# Altium PCB pcb-gazlowe.pcbdoc (part 2 of 2)
Units mil, origin at the board's own origin, x right, y up, seen from the top; angles counter-clockwise.
Board outline 13525.17 x 6011.41 mil, 2 copper layers (Top Layer, Bottom Layer); 275 components, 170 nets, 950 pads, 596 vias.
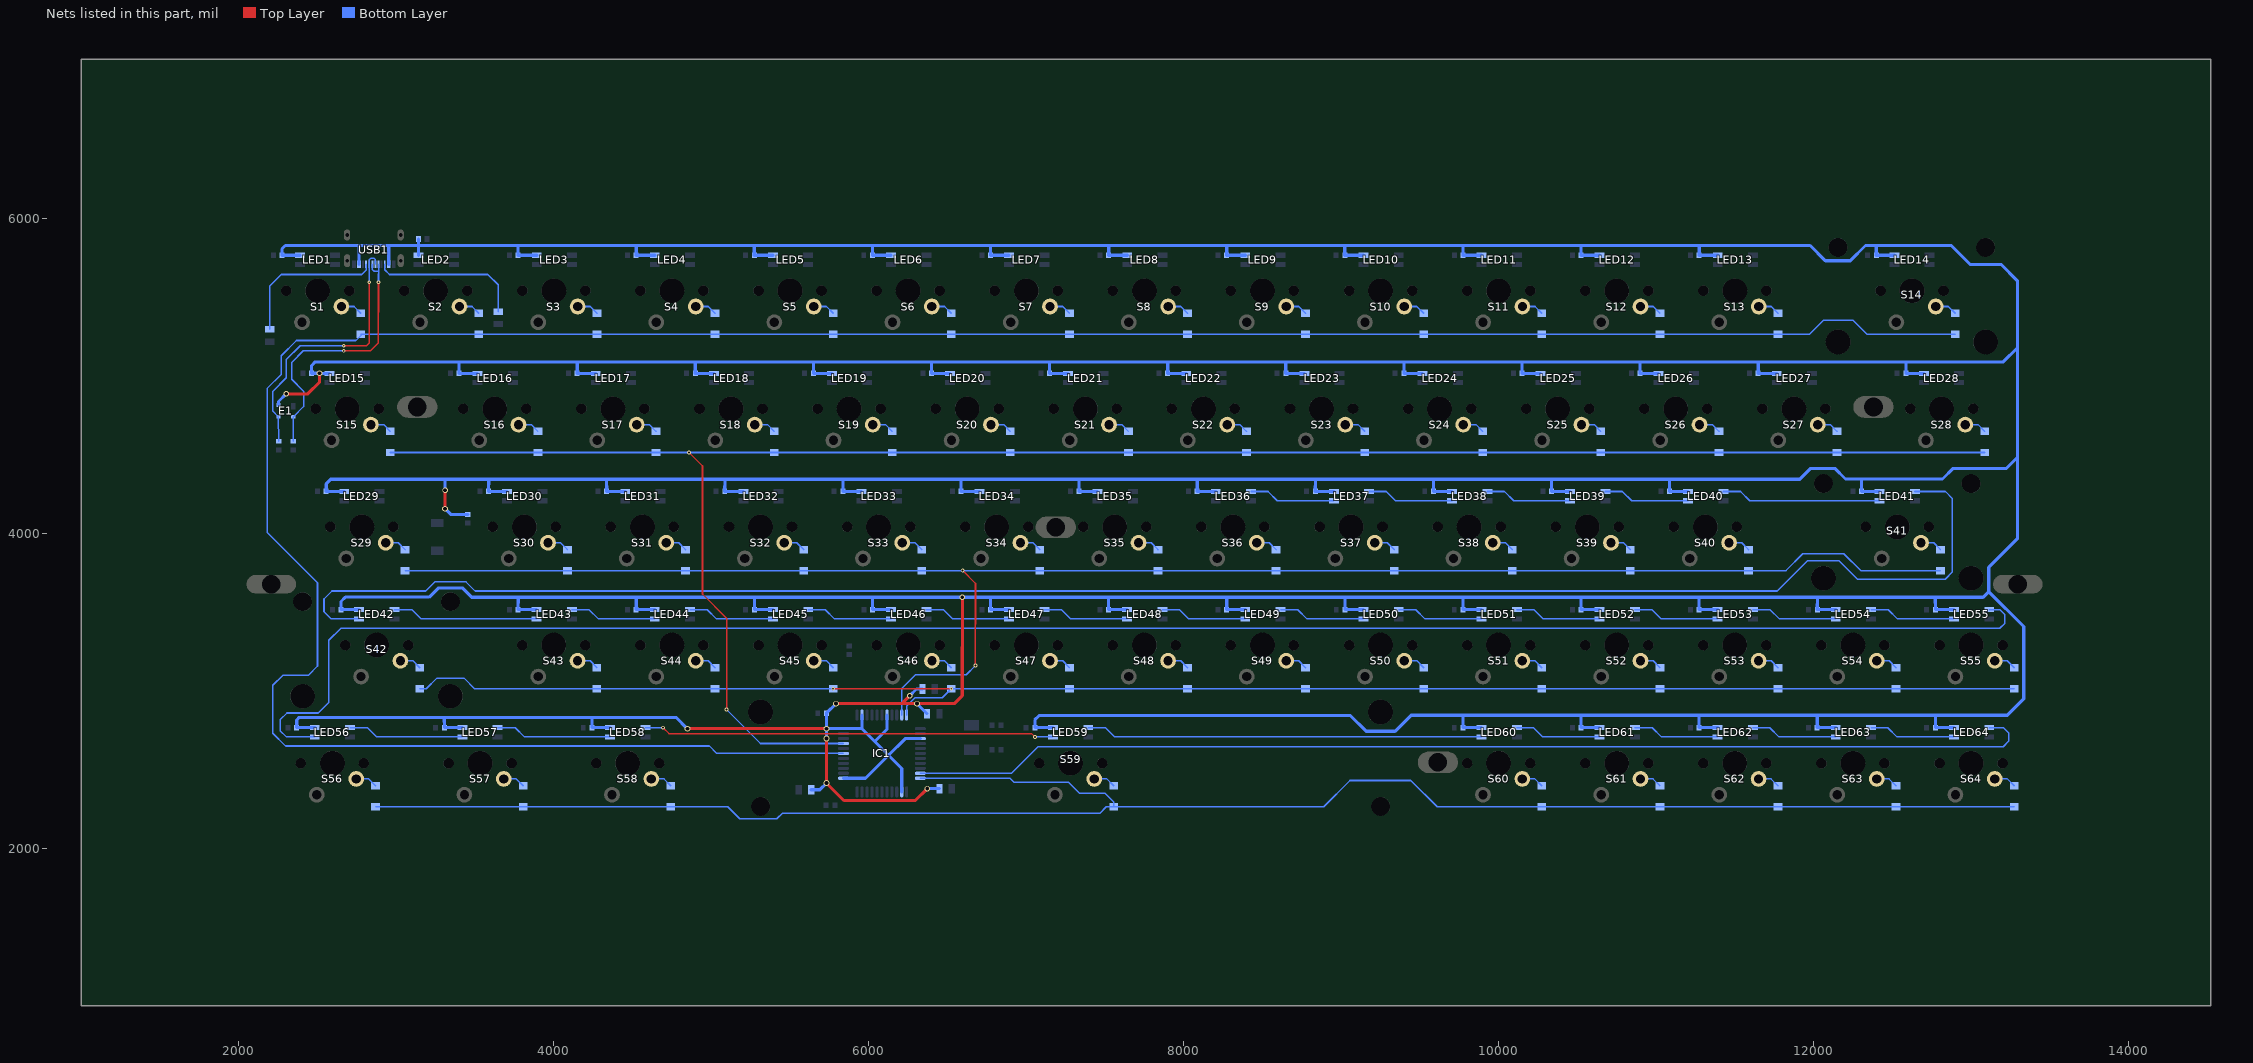
[diagram p2: the nets of this part, all layers, seen from the top]

## Via types
v1: diameter 24.02, hole 12.01, Top Layer to Bottom Layer, tented both sides, 583 vias
v2: diameter 35.98, hole 24.02, Top Layer to Bottom Layer, tented both sides, 13 vias

## Nets (pads, with @x,y where several pads share a name; then routed paths per layer and width w, separated by ;. In a path a pad name is that pad's centre, name@x,y a point inside that pad or via, vN(x,y) a via of type N, cw(c..) or ccw(c..) an arc to the next point about the centre after c; other vN are vias at no path point) (continued)
LED36_4: LED36.4 LED37.2 | length 550.1
  Bottom Layer w10: LED36.4@8430.04,4265.62 8537.4,4265.62 8596.4,4206.52 LED37.2@8955.6,4206.52
LED37_4: LED37.4 LED38.2 | length 550.1
  Bottom Layer w10: LED37.4@9180.04,4265.62 9288.6,4265.62 9347.6,4206.52 LED38.2@9705.6,4206.52
LED38_4: LED38.4 LED39.2 | length 550.1
  Bottom Layer w10: LED38.4@9930.03,4265.62 10038.6,4265.62 10097.6,4206.52 LED39.2@10455.6,4206.52
LED39_4: LED39.4 LED40.2 | length 550.1
  Bottom Layer w10: LED39.4@10680.03,4265.62 10787.8,4265.62 10846.8,4206.52 LED40.2@11205.6,4206.52
LED40_4: LED40.4 LED41.2 | length 1015.7
  Bottom Layer w10: LED40.4@11430.03,4265.62 11537.8,4265.62 11596.8,4206.52 LED41.2@12421.2,4206.52
LED41_4: LED41.4 LED42.2 | length 11601.3
  Bottom Layer w10: LED42.2@2764.96,3456.3 2588.6,3456.32 2542.5,3502.32 2542.5,3582.62 2593.3,3633.42 3188.6,3633.42 3246.5,3691.32 3444.1,3691.32 3502,3633.42 11770.8,3633.42 11961.8,3824.42 12165.3,3824.42 12281.1,3708.62 12838.1,3708.62 12883.4,3753.92 12883.4,4221.72 12839.5,4265.62 LED41.4@12645.7,4265.62
LED42_4: LED42.4 LED43.2 | length 928
  Bottom Layer w10: LED42.4@2989.36,3515.35 3101.2,3515.32 3160.2,3456.32 LED43.2@3893.05,3456.3
LED43_4: LED43.4 LED44.2 | length 549.9
  Bottom Layer w10: LED43.4@4117.5,3515.32 4226,3515.32 4285,3456.32 LED44.2@4643.04,3456.3
LED44_4: LED44.4 LED45.2 | length 550.3
  Bottom Layer w10: LED44.4@4867.5,3515.32 4976,3515.32 5035,3456.32 LED45.2@5393.44,3456.3
LED45_4: LED45.4 LED46.2 | length 550
  Bottom Layer w10: LED45.4@5617.84,3515.35 5726,3515.32 5785,3456.32 LED46.2@6143.43,3456.3
LED46_4: LED46.4 LED47.2 | length 550
  Bottom Layer w10: LED46.4@6367.83,3515.35 6476,3515.32 6535,3456.32 LED47.2@6893.43,3456.3
LED47_4: LED47.4 LED48.2 | length 549.6
  Bottom Layer w10: LED47.4@7117.83,3515.35 7226,3515.32 7285,3456.32 LED48.2@7643.04,3456.3
LED48_4: LED48.4 LED49.2 | length 550
  Bottom Layer w10: LED48.4@7867.44,3515.35 7974.8,3515.32 8033.8,3456.32 LED49.2@8393.03,3456.3
LED49_4: LED49.4 LED50.2 | length 550.4
  Bottom Layer w10: LED49.4@8617.44,3515.35 8726,3515.32 8785,3456.32 LED50.2@9143.42,3456.3
LED50_4: LED50.4 LED51.2 | length 549.6
  Bottom Layer w10: LED50.4@9367.83,3515.35 9476,3515.32 9535,3456.32 LED51.2@9893.03,3456.3
LED51_4: LED51.4 LED52.2 | length 550.4
  Bottom Layer w10: LED51.4@10117.4,3515.32 10226,3515.32 10285,3456.32 LED52.2@10643.42,3456.3
LED52_4: LED52.4 LED53.2 | length 549.6
  Bottom Layer w10: LED52.4@10867.8,3515.32 10976,3515.32 11035,3456.32 LED53.2@11393.02,3456.3
LED53_4: LED53.4 LED54.2 | length 550
  Bottom Layer w10: LED53.4@11617.4,3515.32 11726,3515.32 11785,3456.32 LED54.2@12143.03,3456.3
LED54_4: LED54.4 LED55.2 | length 550
  Bottom Layer w10: LED54.4@12367.4,3515.32 12476,3515.32 12535,3456.32 LED55.2@12893.02,3456.3
LED55_4: LED55.4 LED56.2 | length 11909.8
  Bottom Layer w10: LED56.2@2483.81,2706.69 2303.9,2706.72 2263.8,2746.82 2263.8,2815.32 2307.4,2859.02 2506.3,2859.02 2572.8,2925.62 2572.8,3320.02 2650,3397.22 13185,3397.22 13215.7,3427.92 13215.7,3485.02 13185.4,3515.32 LED55.4@13117.43,3515.35
LED56_4: LED56.4 LED57.2 | length 737.4
  Bottom Layer w10: LED56.4@2708.22,2765.74 2818.5,2765.72 2877.6,2706.72 LED57.2@3421.21,2706.69
LED57_4: LED57.4 LED58.2 | length 737.4
  Bottom Layer w10: LED57.4@3645.61,2765.74 3756.7,2765.72 3815.7,2706.72 LED58.2@4358.61,2706.69
LED58_4: LED58.4 LED59.2 | length 2612.7
  Top Layer w10: v1(4695.66,2765.74) 4733.1,2728.32 7035.45,2728.32 v1(7057.08,2706.69)
  Bottom Layer w10: LED58.4@4583.02,2765.74 v1(4695.66,2765.74) ; v1(7057.08,2706.69) LED59.2@7171.25,2706.69
LED59_4: LED59.4 LED60.2 | length 2521.7
  Bottom Layer w10: LED59.4@7395.66,2765.74 7505.1,2765.72 7564.2,2706.72 LED60.2@9893.03,2706.69
LED60_4: LED60.4 LED61.2 | length 550.4
  Bottom Layer w10: LED60.4@10117.43,2765.74 10223.2,2765.72 10282.3,2706.72 LED61.2@10643.42,2706.69
LED61_4: LED61.4 LED62.2 | length 549.6
  Bottom Layer w10: LED61.4@10867.83,2765.74 10976.8,2765.72 11035.8,2706.72 LED62.2@11393.02,2706.69
LED62_4: LED62.4 LED63.2 | length 550
  Bottom Layer w10: LED62.4@11617.43,2765.74 11723.2,2765.72 11782.3,2706.72 LED63.2@12143.02,2706.69
LED63_4: LED63.4 LED64.2 | length 550
  Bottom Layer w10: LED63.4@12367.43,2765.74 12473.2,2765.72 12532.3,2706.72 LED64.2@12893.03,2706.69
RGB: IC1.21 LED64.4 | length 7185.5
  Bottom Layer w10: IC1.21@6329.52,2475.99 6908.3,2476.02 7077.2,2644.92 13206.3,2644.92 13240.5,2679.12 13240.5,2732.62 13207.5,2765.72 LED64.4@13117.43,2765.74
ROW-0: D1.1 D2.1 D3.1 D4.1 D5.1 D6.1 D7.1 D8.1 D9.1 D10.1 D11.1 D12.1 D13.1 D14.1 IC1.39 | length 17224.7
  Bottom Layer w10: D1.1@2776.38,5262.98 D2.1@3525.98,5262.98 D3.1@4276.37,5262.98 D4.1@5025.98,5262.98 D5.1@5775.98,5262.98 D6.1@6525.97,5262.98 D7.1@7276.37,5262.98 D8.1@8026.36,5262.98 D9.1@8775.97,5262.98 D10.1@9525.97,5262.98 D11.1@10276.36,5262.98 D12.1@11026.36,5262.98 D13.1@11776.36,5262.98 11974.8,5263.02 12064.9,5353.12 12252.3,5353.12 12342.5,5263.02 D14.1@12901.16,5262.98 ; D1.1@2783.6,5263.02 2745,5224.42 2368.1,5224.42 2270.5,5126.72 2270.5,5009.02 2181.1,4919.32 2181.1,4006.72 2501.2,3686.62 2501.2,3156.72 2443.7,3099.22 2281.5,3099.22 2217.3,3035.02 2217.3,2730.32 2298.4,2649.22 4990.1,2649.22 5037.4,2601.92 IC1.39@5841.3,2601.92
ROW-1: D15.1 D16.1 D17.1 D18.1 D19.1 D20.1 D21.1 D22.1 D23.1 D24.1 D25.1 D26.1 D27.1 D28.1 IC1.41 | length 12687.2
  Top Layer w10: v1(4860.74,4512.98) 4946.06,4427.67 4946.06,4277.18 4946.06,4252.61 4946.06,3614.17 5099.2,3461.02 v1(5099.2,2880.7)
  Bottom Layer w10: D15.1@2963.78,4512.99 D16.1@3901.18,4512.99 D17.1@4651.18,4512.99 v1(4860.74,4512.98) D18.1@5401.17,4512.99 D19.1@6151.17,4512.99 D20.1@6901.17,4512.99 D21.1@7651.17,4512.99 D22.1@8401.17,4512.99 D23.1@9151.17,4512.99 D24.1@9901.16,4512.99 D25.1@10651.16,4512.99 D26.1@11401.16,4512.99 D27.1@12151.16,4512.99 D28.1@13088.56,4512.99 ; v1(5099.2,2880.7) 5314.6,2665.32 IC1.41@5841.3,2665.32
ROW-2: D29.1 D30.1 D31.1 D32.1 D33.1 D34.1 D35.1 D36.1 D37.1 D38.1 D39.1 D40.1 D41.1 IC1.10 | length 11171.5
  Top Layer w10: v1(6598.43,3762.98) 6679.9,3681.52 v1(6679.12,3159.84)
  Bottom Layer w10: D29.1@3057.48,3762.99 D30.1@4088.58,3762.99 D31.1@4838.18,3762.99 D32.1@5588.57,3762.99 D33.1@6338.57,3762.99 v1(6598.43,3762.98) D34.1@7088.57,3762.99 D35.1@7838.57,3762.99 D36.1@8588.57,3762.99 D37.1@9338.57,3762.99 D38.1@10088.57,3762.99 D39.1@10838.56,3762.99 D40.1@11588.56,3762.99 11826.7,3763.02 11933.4,3869.72 12194.1,3869.72 12300.8,3763.02 D41.1@12807.46,3762.99 ; IC1.10@6211.4,2846.02 6211.4,3014.12 6299.2,3101.92 6621.3,3101.92 v1(6679.12,3159.84)
ROW-3: D42.1 D43.1 D44.1 D45.1 D46.1 D47.1 D48.1 D49.1 D50.1 D51.1 D52.1 D53.1 D54.1 D55.1 IC1.11 | length 10571.9
  Top Layer w10: v1(5775.97,3012.98) v1(6525.97,3012.98)
  Bottom Layer w10: D42.1@3150.78,3012.99 3191.8,3013.02 3259.5,3080.72 3431.1,3080.72 3498.8,3013.02 D43.1@4275.59,3012.99 D44.1@5025.58,3012.99 v1(5775.97,3012.98) ; IC1.11@6242.9,2846.02 6242.9,2902.72 6296.1,2955.92 6468.9,2955.92 v1(6525.97,3012.98) D47.1@7276.37,3012.99 D48.1@8025.97,3012.99 D49.1@8775.97,3012.99 D50.1@9526.36,3012.99 D51.1@10275.97,3012.99 D52.1@11026.36,3012.99 D53.1@11781.1,3013.02 ; D53.1@11775.96,3012.99 D54.1@12525.96,3012.99 D55.1@13275.96,3012.99
ROW-4: D56.1 D57.1 D58.1 D59.1 D60.1 D61.1 D62.1 D63.1 D64.1 IC1.22 | length 11928.5
  Bottom Layer w10: D56.1@2870.08,2262.99 D57.1@3807.08,2262.99 D58.1@4744.88,2262.99 5105.9,2263.02 5182.3,2186.62 5417.7,2186.62 5453.9,2222.82 7470.1,2222.82 7510.2,2263.02 D59.1@7557.47,2262.99 ; IC1.22@6329.52,2444.49 6898.4,2444.12 6924,2418.52 7270.9,2418.52 7340.9,2348.42 7502.3,2348.42 7557.5,2293.22 D59.1@7557.47,2262.99 ; D64.1@13275.96,2262.99 D63.1@12525.96,2262.99 D62.1@11775.96,2262.99 D61.1@11026.36,2262.99 D60.1@10275.97,2262.99 9611.8,2263.02 9444.5,2430.32 9058.3,2430.32 8890.9,2263.02 D59.1@7557.47,2262.99
S1_COL: D1.2 S1.COL | length 141.3
  Bottom Layer w10: S1.COL@2653.11,5440.19 2733.1,5440.22 D1.2@2776.38,5396.84
S2_COL: D2.2 S2.COL | length 141.4
  Bottom Layer w10: S2.COL@3402.71,5440.19 3483.1,5440.22 D2.2@3525.98,5396.84
S3_COL: D3.2 S3.COL | length 141.3
  Bottom Layer w10: S3.COL@4153.1,5440.19 4233,5440.22 D3.2@4276.37,5396.84
S4_COL: D4.2 S4.COL | length 141.3
  Bottom Layer w10: S4.COL@4902.71,5440.19 4982.6,5440.22 D4.2@5025.98,5396.84
S5_COL: D5.2 S5.COL | length 141.4
  Bottom Layer w10: S5.COL@5652.71,5440.19 5733.1,5440.22 D5.2@5775.98,5396.84
S6_COL: D6.2 S6.COL | length 141.4
  Bottom Layer w10: S6.COL@6402.7,5440.19 6483.1,5440.22 D6.2@6525.97,5396.84
S7_COL: D7.2 S7.COL | length 141.5
  Bottom Layer w10: S7.COL@7153.1,5440.19 7233.8,5440.22 D7.2@7276.37,5396.84
S8_COL: D8.2 S8.COL | length 141.3
  Bottom Layer w10: S8.COL@7903.1,5440.19 7983.1,5440.22 D8.2@8026.36,5396.84
S9_COL: D9.2 S9.COL | length 141.4
  Bottom Layer w10: S9.COL@8652.7,5440.19 8733.1,5440.22 D9.2@8775.97,5396.84
S10_COL: D10.2 S10.COL | length 141.3
  Bottom Layer w10: S10.COL@9402.7,5440.19 9482.7,5440.22 D10.2@9525.97,5396.84
S11_COL: D11.2 S11.COL | length 141.3
  Bottom Layer w10: S11.COL@10153.09,5440.19 10233.1,5440.22 D11.2@10276.36,5396.84
S12_COL: D12.2 S12.COL | length 141.3
  Bottom Layer w10: S12.COL@10903.09,5440.19 10983.1,5440.22 D12.2@11026.36,5396.84
S13_COL: D13.2 S13.COL | length 141.2
  Bottom Layer w10: S13.COL@11653.09,5440.19 11732.7,5440.22 D13.2@11776.36,5396.84
S14_COL: D14.2 S14.COL | length 141.3
  Bottom Layer w10: S14.COL@12777.89,5440.19 12857.8,5440.22 D14.2@12901.16,5396.84
S15_COL: D15.2 S15.COL | length 141.5
  Bottom Layer w10: S15.COL@2840.51,4690.19 2921.3,4690.22 D15.2@2963.78,4646.84
S16_COL: D16.2 S16.COL | length 141.3
  Bottom Layer w10: S16.COL@3777.91,4690.19 3857.9,4690.22 D16.2@3901.18,4646.84
S17_COL: D17.2 S17.COL | length 141.5
  Bottom Layer w10: S17.COL@4527.91,4690.19 4608.7,4690.22 D17.2@4651.18,4646.84
S18_COL: D18.2 S18.COL | length 141.5
  Bottom Layer w10: S18.COL@5277.9,4690.19 5358.7,4690.22 D18.2@5401.17,4646.84
S19_COL: D19.2 S19.COL | length 141.5
  Bottom Layer w10: S19.COL@6027.9,4690.19 6108.6,4690.22 D19.2@6151.17,4646.84
S20_COL: D20.2 S20.COL | length 141.5
  Bottom Layer w10: S20.COL@6777.9,4690.19 6858.6,4690.22 D20.2@6901.17,4646.84
S21_COL: D21.2 S21.COL | length 141.3
  Bottom Layer w10: S21.COL@7527.9,4690.19 7607.9,4690.22 D21.2@7651.17,4646.84
S22_COL: D22.2 S22.COL | length 141.5
  Bottom Layer w10: S22.COL@8277.9,4690.19 8358.6,4690.22 D22.2@8401.17,4646.84
S23_COL: D23.2 S23.COL | length 142
  Bottom Layer w10: S23.COL@9027.9,4690.19 9109,4690.22 9151.2,4648.02 D23.2@9151.17,4646.84
S24_COL: D24.2 S24.COL | length 141.3
  Bottom Layer w10: S24.COL@9777.9,4690.19 9857.9,4690.22 D24.2@9901.16,4646.84
S25_COL: D25.2 S25.COL | length 141.5
  Bottom Layer w10: S25.COL@10527.89,4690.19 10608.6,4690.22 D25.2@10651.16,4646.84
S26_COL: D26.2 S26.COL | length 141.3
  Bottom Layer w10: S26.COL@11277.89,4690.19 11357.8,4690.22 D26.2@11401.16,4646.84
S27_COL: D27.2 S27.COL | length 141.3
  Bottom Layer w10: S27.COL@12027.89,4690.19 12107.9,4690.22 D27.2@12151.16,4646.84
S28_COL: D28.2 S28.COL | length 141.4
  Bottom Layer w10: S28.COL@12965.29,4690.19 13045.6,4690.22 D28.2@13088.56,4646.84
S29_COL: D29.2 S29.COL | length 141.2
  Bottom Layer w10: S29.COL@2934.21,3940.19 3013.8,3940.22 D29.2@3057.48,3896.84
S30_COL: D30.2 S30.COL | length 141.2
  Bottom Layer w10: S30.COL@3965.31,3940.2 4044.9,3940.22 D30.2@4088.58,3896.84
S31_COL: D31.2 S31.COL | length 140.9
  Bottom Layer w10: S31.COL@4715.31,3940.2 4794.9,3940.22 D31.2@4838.18,3896.84
S32_COL: D32.2 S32.COL | length 141.3
  Bottom Layer w10: S32.COL@5465.31,3940.19 5545.3,3940.22 D32.2@5588.57,3896.84
S33_COL: D33.2 S33.COL | length 141.2
  Bottom Layer w10: S33.COL@6215.3,3940.19 6294.9,3940.22 D33.2@6338.57,3896.84
S34_COL: D34.2 S34.COL | length 141.2
  Bottom Layer w10: S34.COL@6965.3,3940.19 7044.9,3940.22 D34.2@7088.57,3896.84
S35_COL: D35.2 S35.COL | length 141.3
  Bottom Layer w10: S35.COL@7715.3,3940.19 7795.3,3940.22 D35.2@7838.57,3896.84
S36_COL: D36.2 S36.COL | length 141.3
  Bottom Layer w10: S36.COL@8465.3,3940.19 8545.2,3940.22 D36.2@8588.57,3896.84
S37_COL: D37.2 S37.COL | length 141.3
  Bottom Layer w10: S37.COL@9215.3,3940.19 9295.3,3940.22 D37.2@9338.57,3896.84
S38_COL: D38.2 S38.COL | length 141.3
  Bottom Layer w10: S38.COL@9965.3,3940.19 10045.3,3940.22 D38.2@10088.57,3896.84
S39_COL: D39.2 S39.COL | length 141.3
  Bottom Layer w10: S39.COL@10715.3,3940.19 10795.3,3940.22 D39.2@10838.56,3896.84
S40_COL: D40.2 S40.COL | length 141.4
  Bottom Layer w10: S40.COL@11465.29,3940.19 11545.6,3940.22 D40.2@11588.56,3896.84
S41_COL: D41.2 S41.COL | length 141.4
  Bottom Layer w10: S41.COL@12684.19,3940.19 12764.5,3940.22 D41.2@12807.46,3896.84
S42_COL: D42.2 S42.COL | length 140.8
  Bottom Layer w10: S42.COL@3027.91,3190.19 3107.1,3190.22 D42.2@3150.78,3146.85
S43_COL: D43.2 S43.COL | length 141
  Bottom Layer w10: S43.COL@4152.71,3190.19 4232.7,3190.22 D43.2@4275.59,3146.85
S44_COL: D44.2 S44.COL | length 141
  Bottom Layer w10: S44.COL@4902.71,3190.19 4982.7,3190.22 D44.2@5025.58,3146.85
S45_COL: D45.2 S45.COL | length 141.1
  Bottom Layer w10: S45.COL@5653.1,3190.19 5733.5,3190.22 D45.2@5775.98,3146.85
S46_COL: D46.2 S46.COL | length 140.9
  Bottom Layer w10: S46.COL@6403.1,3190.19 6482.7,3190.22 D46.2@6525.98,3146.85
S47_COL: D47.2 S47.COL | length 141.4
  Bottom Layer w10: S47.COL@7153.1,3190.19 7233.5,3190.22 D47.2@7276.37,3146.85
S48_COL: D48.2 S48.COL | length 141.3
  Bottom Layer w10: S48.COL@7902.7,3190.19 7982.6,3190.22 D48.2@8025.97,3146.85
S49_COL: D49.2 S49.COL | length 141.3
  Bottom Layer w10: S49.COL@8652.7,3190.19 8732.6,3190.22 D49.2@8775.97,3146.85
S50_COL: D50.2 S50.COL | length 141.3
  Bottom Layer w10: S50.COL@9403.09,3190.19 9483.1,3190.22 D50.2@9526.36,3146.85
S51_COL: D51.2 S51.COL | length 141.3
  Bottom Layer w10: S51.COL@10152.7,3190.19 10232.6,3190.22 D51.2@10275.97,3146.85
S52_COL: D52.2 S52.COL | length 141.3
  Bottom Layer w10: S52.COL@10903.09,3190.19 10983.1,3190.22 D52.2@11026.36,3146.85
S53_COL: D53.2 S53.COL | length 141.3
  Bottom Layer w10: S53.COL@11652.69,3190.19 11732.7,3190.22 D53.2@11775.96,3146.85
S54_COL: D54.2 S54.COL | length 141.1
  Bottom Layer w10: S54.COL@12402.69,3190.19 12481.9,3190.22 D54.2@12525.96,3146.85
S55_COL: D55.2 S55.COL | length 141.3
  Bottom Layer w10: S55.COL@13152.69,3190.19 13232.6,3190.22 D55.2@13275.96,3146.85
S56_COL: D56.2 S56.COL | length 141.2
  Bottom Layer w10: S56.COL@2746.81,2440.2 2826.4,2440.22 D56.2@2870.08,2396.85
S57_COL: D57.2 S57.COL | length 140.9
  Bottom Layer w10: S57.COL@3684.21,2440.2 3763.8,2440.22 D57.2@3807.08,2396.85
S58_COL: D58.2 S58.COL | length 141.5
  Bottom Layer w10: S58.COL@4621.61,2440.2 4702.4,2440.22 D58.2@4744.88,2396.85
S59_COL: D59.2 S59.COL | length 141.4
  Bottom Layer w10: S59.COL@7434.2,2440.2 7514.6,2440.22 D59.2@7557.47,2396.85
S60_COL: D60.2 S60.COL | length 141.2
  Bottom Layer w10: S60.COL@10152.7,2440.19 10232.3,2440.22 D60.2@10275.97,2396.85
S61_COL: D61.2 S61.COL | length 141.1
  Bottom Layer w10: S61.COL@10903.09,2440.2 10982.3,2440.22 D61.2@11026.36,2396.85
S62_COL: D62.2 S62.COL | length 141.2
  Bottom Layer w10: S62.COL@11652.69,2440.2 11732.3,2440.22 D62.2@11775.96,2396.85
S63_COL: D63.2 S63.COL | length 141.3
  Bottom Layer w10: S63.COL@12402.69,2440.19 12481.5,2440.22 12524.8,2396.82 D63.2@12525.96,2396.85
S64_COL: D64.2 S64.COL | length 141.4
  Bottom Layer w10: S64.COL@13152.69,2440.19 13233,2440.22 D64.2@13275.96,2396.85
S$68: 
S$164: 
S$10260: 
S$10265: 
S$10267: 
S$14279: 
S$14291: 
S$32151: 
S$32163: 
USB1_A5: R5.2 USB1.A5 | length 965.9
  Bottom Layer w10: R5.2@2196.8,5295.22 2196.9,5568.82 2271.7,5643.72 2781.5,5643.72 2810.2,5672.42 USB1.A5@2810.2,5708.52
USB1_A6: E1.2 R3.2 USB1.A6 USB1.B6 | length 1736.9
  Top Layer w10: v1(2667.71,5158.65) 2838.36,5158.65 2887.81,5208.1 v1@2888.6,5593.92
  Bottom Layer w10: R3.2@2348.42,4584.64 2347.6,4739.32 2413,4804.72 2413,4902.72 2337.4,4978.32 2337.4,5084.62 2411.4,5158.62 v1@2667.7,5158.62 ; USB1.A6@2849.6,5708.52 2849.6,5676.02 2861,5664.52 2888.8,5664.52 ; v1@2888.6,5593.92 USB1.B6@2889,5708.52
  other v1: 2888.59,5593.95
USB1_A7: E1.3 R4.2 USB1.A7 USB1.B7 | length 1744.1
  Top Layer w10: v1@2669.29,5190.94 2812.64,5190.94 2829.9,5208.2 v1(2829.9,5594)
  Bottom Layer w10: E1.3@2253.1,4739.32 R4.2@2253.94,4584.64 ; E1.3@2253.2,4739.32 2216.5,4776.02 2216.5,4901.12 2303.1,4987.82 2303.1,5103.12 2390.9,5190.92 v1(2667.71,5190.93) ; v1(2829.9,5594) 2829.9,5708.52 2829.9,5737.02 2840.9,5748.02 2858.3,5748.02 2869.3,5737.02 USB1.A7@2869.3,5708.52
USB1_B5: R6.2 USB1.B5 | length 966.1
  Bottom Layer w10: USB1.B5@2928.3,5708.52 2928.3,5673.22 2957.9,5643.72 3583.1,5643.72 3648.8,5577.92 R6.2@3649.21,5407.08
VCC: C1.2 C2.2 C3.2 C4.2 C5.2 C6.2 C7.2 C8.2 C9.2 C10.2 C11.2 C12.2 C13.2 C14.2 C15.2 C16.2 C17.2 C18.2 C19.2 C20.2 C21.2 C22.2 C23.2 C24.2 C25.2 C26.2 C27.2 C28.2 C29.2 C30.2 C31.2 C32.2 C33.2 C34.2 C35.2 C36.2 C37.2 C38.2 C39.2 C40.2 C41.2 C42.2 C43.2 C44.2 C45.2 C46.2 C47.2 C48.2 C49.2 C50.2 C51.2 C52.2 C53.2 C54.2 C55.2 C56.2 C57.2 C58.2 C59.2 C60.2 C61.2 C62.2 C63.2 C64.2 C68.2 C69.2 C70.2 C71.2 C72.2 E1.4 IC1.2 IC1.7 IC1.14 IC1.24 IC1.34 IC1.44 LED1.1 LED2.1 LED3.1 LED4.1 LED5.1 LED6.1 LED7.1 LED8.1 LED9.1 LED10.1 LED11.1 LED12.1 LED13.1 LED14.1 LED15.1 LED16.1 LED17.1 LED18.1 LED19.1 LED20.1 LED21.1 LED22.1 LED23.1 LED24.1 LED25.1 LED26.1 LED27.1 LED28.1 LED29.1 LED30.1 LED31.1 LED32.1 LED33.1 LED34.1 LED35.1 LED36.1 LED37.1 LED38.1 LED39.1 LED40.1 LED41.1 LED42.1 LED43.1 LED44.1 LED45.1 LED46.1 LED47.1 LED48.1 LED49.1 LED50.1 LED51.1 LED52.1 LED53.1 LED54.1 LED55.1 LED56.1 LED57.1 LED58.1 LED59.1 LED60.1 LED61.1 LED62.1 LED63.1 LED64.1 R1.2 USB1.A4B9 USB1.B4A9 | length 73772.1
  Top Layer w20: v2(2302.36,4885.82) 2439.8,4885.42 2513.7,4958.92 v2@2513.7,5016.12 ; v2(3311.4,4155.92) v2(3311.8,4272.82) ; v2(4850.4,2759.42) v2(5733.49,2759.42) ; v2(5733.46,2696.84) v2(5733.5,2413.82) 5844.1,2303.12 6297.6,2303.12 v2(6373.2,2378.72) ; v2(5793.7,2918.52) v2(6308.07,2918.52) ; 6211.8,2918.52 v2(6261.8,2967.72) ; v2(6308.07,2918.52) 6545.7,2918.52 6596.1,2968.92 v2(6596.24,3594.12)
  Bottom Layer w20: E1.4@2253.2,4814.12 2253.2,4836.62 v2(2302.36,4885.82) ; LED1.1@2388.98,5765.74 C1.2@2275.59,5765.74 2275.6,5805.92 2297.2,5827.52 11980.3,5827.52 12077.1,5730.72 12234.6,5730.72 12331.4,5827.52 12876.4,5827.52 12997.2,5706.72 13193.7,5706.72 13296,5604.32 13296,5177.02 ; LED56.1@2483.81,2765.74 C56.2@2369.29,2765.74 2369.3,2814.52 2385.4,2830.72 4244.2,2830.72 ; LED15.1@2577.56,5015.74 2513.7,5016.12 C15.2@2462.99,5016.53 2463,5064.52 2487.1,5088.62 13207.1,5088.62 13296,5177.02 ; LED29.1@2671.21,4265.62 C29.2@2556.69,4266.53 2556.7,4314.12 2585.8,4343.32 11914.5,4343.32 11983.4,4412.22 12137,4412.22 12204.7,4344.52 12820.5,4344.52 12888.2,4412.22 13227.2,4412.22 13296,4481.02 ; LED42.1@2764.96,3515.35 C42.2@2650.39,3515.74 2650.4,3566.52 2678.3,3594.52 3209.9,3594.52 3267.3,3651.92 3423.2,3651.92 3481.1,3594.12 v2(6596.24,3594.12) ; USB1.A4B9@2765,5708.52 2765,5827.52 ; USB1.B4A9@2953.9,5708.52 2953.9,5827.52 ; C2.2@3142.91,5868.89 LED2.1@3143.04,5765.62 ; 3306.6,2830.72 C57.2@3306.69,2766.14 LED57.1@3421.21,2765.74 ; v2(3311.4,4155.92) 3346.9,4120.42 R1.2@3455.9,4120.42 ; 3311.7,4343.32 v2(3311.8,4272.82) ; 3399.9,5088.62 C16.2@3399.99,5016.53 LED16.1@3518.24,5015.74 ; 3588.5,4343.32 C30.2@3587.79,4266.53 LED30.1@3705.64,4265.62 ; 3775.6,5827.52 C3.2@3775.59,5765.74 LED3.1@3893.44,5765.62 ; 3776.1,3594.12 C43.2@3775.19,3515.74 LED43.1@3893.05,3515.35 ; 4150.4,5088.62 C17.2@4150.39,5016.53 LED17.1@4268.24,5015.74 ; 4337.1,4343.32 C31.2@4337.79,4266.53 LED31.1@4455.64,4265.62 ; LED58.1@4358.61,2765.74 C58.2@4244.09,2766.14 4244.2,2830.72 ; 4525.1,3594.12 C44.2@4525.19,3515.74 LED44.1@4643.04,3515.35 ; 4525.2,5827.52 C4.2@4525.19,5765.74 LED4.1@4643.04,5765.61 ; v2(4850.4,2759.42) 4779.9,2829.92 4244.2,2830.72 ; 4900.4,5088.62 C18.2@4900.39,5016.53 LED18.1@5018.23,5015.74 ; 5088.2,4343.32 C32.2@5087.39,4266.53 LED32.1@5205.64,4265.62 ; 5275.2,5827.52 C5.2@5275.19,5765.74 LED5.1@5393.04,5765.62 ; 5276.1,3594.12 C45.2@5275.58,3515.74 LED45.1@5393.44,3515.35 ; C69.2@5636.6,2371.62 5691.3,2371.62 v2(5733.5,2413.82) ; 5650.4,5088.62 C19.2@5650.38,5016.53 LED19.1@5768.23,5015.74 ; v2(5733.46,2696.84) v2(5733.49,2759.42) ; v2(5793.7,2918.52) C68.2@5733.06,2857.87 v2(5733.49,2759.42) ; 5838.2,4343.32 C33.2@5837.78,4266.53 LED33.1@5955.64,4265.62 ; IC1.34@5841.33,2444.49 5981.5,2444.52 6127.6,2590.52 ; IC1.2@5959.4,2846.02 5959,2759.02 ; 6025.2,5827.52 C6.2@6025.19,5765.74 LED6.1@6143.04,5765.62 ; 6026.1,3594.12 C46.2@6025.98,3515.74 LED46.1@6143.43,3515.35 ; 6040.5,2677.62 6116.9,2754.02 IC1.7@6116.9,2846.02 ; 6127.7,2590.32 6233.8,2696.42 IC1.14@6329.5,2696.42 ; IC1.24@6211.4,2357.87 6211.4,2506.72 5959,2759.02 ; v2(6261.8,2967.72) 6305.1,3011.02 C72.2@6342.51,3011.02 ; v2(6308.07,2918.52) C71.2@6372.04,2855.11 ; v2(6373.2,2378.72) C70.2@6450.38,2378.34 ; 6400.4,5088.62 C20.2@6400.38,5016.53 LED20.1@6518.23,5015.74 ; 6588.2,4343.32 C34.2@6587.78,4266.53 LED34.1@6705.63,4265.62 ; v2(6596.24,3594.12) 6703.54,3594.12 6728.11,3594.12 13078.7,3594.12 13114.5,3629.92 ; 6775.1,3594.12 C47.2@6775.58,3515.74 LED47.1@6893.43,3515.35 ; 6775.6,5827.52 C7.2@6775.58,5765.74 LED7.1@6893.43,5765.62 ; 7150.4,5088.62 C21.2@7150.38,5016.53 LED21.1@7268.23,5015.74 ; LED59.1@7171.25,2765.74 C59.2@7056.68,2766.14 7056.7,2815.32 7084.6,2843.32 9060.6,2843.32 9160.6,2743.32 9344.9,2743.32 9446.5,2844.92 13231.9,2844.92 13336.2,2949.22 13336.2,3408.22 13114.5,3629.92 ; 7338.2,4343.32 C35.2@7337.78,4266.53 LED35.1@7455.63,4265.62 ; 7525.1,3594.12 C48.2@7525.18,3515.74 LED48.1@7643.04,3515.35 ; 7525.6,5827.52 C8.2@7525.58,5765.74 LED8.1@7643.43,5765.62 ; 7900.4,5088.62 C22.2@7900.38,5016.53 LED22.1@8018.23,5015.74 ; 8088.2,4343.32 C36.2@8087.78,4266.53 LED36.1@8205.63,4265.62 ; 8275.1,3594.12 C49.2@8275.18,3515.74 LED49.1@8393.03,3515.35 ; 8275.2,5827.52 C9.2@8275.18,5765.74 LED9.1@8393.03,5765.61 ; 8650.4,5088.62 C23.2@8650.38,5016.53 LED23.1@8768.23,5015.74 ; 8838.2,4343.32 C37.2@8837.78,4266.53 LED37.1@8955.63,4265.62 ; 9025.2,5827.52 C10.2@9025.18,5765.74 LED10.1@9143.03,5765.62 ; 9026.1,3594.12 C50.2@9025.97,3515.74 LED50.1@9143.42,3515.35 ; 9400.4,5088.62 C24.2@9400.38,5016.53 LED24.1@9518.23,5015.74 ; 9588.2,4343.32 C38.2@9587.78,4266.53 LED38.1@9705.63,4265.62 ; 9775.1,3594.12 C51.2@9775.18,3515.74 LED51.1@9893.03,3515.35 ; 9775.2,2844.92 C60.2@9775.18,2766.14 LED60.1@9893.03,2765.74 ; 9775.6,5827.52 C11.2@9775.57,5765.74 LED11.1@9893.43,5765.62 ; 10150.4,5088.62 C25.2@10150.38,5016.53 LED25.1@10268.22,5015.74 ; 10337.6,4343.32 C39.2@10337.78,4266.53 LED39.1@10455.63,4265.62 ; 10525.6,2844.92 C61.2@10525.57,2766.14 LED61.1@10643.42,2765.74 ; 10525.6,5827.52 C12.2@10525.57,5765.74 LED12.1@10643.42,5765.62 ; 10526.1,3594.12 C52.2@10525.57,3515.74 LED52.1@10643.42,3515.35 ; 10900.4,5088.62 C26.2@10900.37,5016.53 LED26.1@11018.22,5015.74 ; 11087.6,4343.32 C40.2@11087.77,4266.53 LED40.1@11205.63,4265.62 ; 11275.1,3594.12 C53.2@11275.18,3515.74 LED53.1@11393.02,3515.35 ; 11275.2,2844.92 C62.2@11275.18,2766.14 LED62.1@11393.02,2765.74 ; 11275.6,5827.52 C13.2@11275.57,5765.74 LED13.1@11393.42,5765.62 ; 11650.4,5088.62 C27.2@11650.37,5016.53 LED27.1@11768.23,5015.74 ; 12025.2,2844.92 C63.2@12025.17,2766.14 LED63.1@12143.02,2765.74 ; 12026.1,3594.12 C54.2@12025.57,3515.74 LED54.1@12143.03,3515.35 ; 12306.8,4344.52 C41.2@12306.67,4266.53 LED41.1@12421.24,4265.62 ; 12400.4,5827.52 C14.2@12400.37,5765.74 LED14.1@12514.94,5765.61 ; 12587.8,5088.62 C28.2@12587.77,5016.53 LED28.1@12702.34,5015.74 ; 12775.1,3594.12 C55.2@12775.17,3515.74 LED55.1@12893.02,3515.35 ; 12775.2,2844.92 C64.2@12775.17,2766.14 LED64.1@12893.03,2765.74 ; v2(5733.49,2759.42) IC1.44@5841.33,2759.45 5959,2759.02 ; 13114.5,3629.92 13114.5,3783.42 13296,3964.92 13296,4481.02 ; 13296,4481.02 13296,5177.02
  other v2: 2513.67,5016.17
pads on no net: IC1.8 IC1.26 IC1.27 IC1.29 IC1.42 LED1.2 S1. S2. S3. S4. S5. S6. S7. S8. S9. S10. S11. S12. S13. S14. S15. S16. S17. S18. S19. S20. S21. S22. S23. S24. S25. S26. S27. S28. S29. S30. S31. S32. S33. S34. S35. S36. S37. S38. S39. S40. S41. S42. S43. S44. S45. S46. S47. S48. S49. S50. S51. S52. S53. S54. S55. S56. S57. S58. S59. S60. S61. S62. S63. S64. USB1.A8 USB1.B8

## Polygon pours and split planes (outlines as drawn)
GND on Top Layer (solid): 1500,6511.41 14015.33,6511.41 14020.05,6506.68 14020.05,1506.69 14025.17,1501.57 1508.27,1501.57 1506.69,1500
GND on Bottom Layer (solid): 1811.81,6212.19 13707.06,6212.19 13709.42,6214.56 13709.42,1816.93 13707.46,1814.96 1807.48,1814.96 1805.12,1812.6

## Keep-outs
Keep-Out Layer:
  lines w10: 2135.67,2248.97 ccw(c2213.78,2248.97) 2213.78,2170.87 ; 13291.24,2170.79 ccw(c13291.24,2250.79) 13371.24,2250.79
  lines w10 net S$164: 2135.82,5828.73 cw(c2213.95,5829.97) 2215.2,5908.1 ; 13291.32,5908.26 cw(c13291.32,5828.26) 13371.32,5828.26
  lines w10 net S$32151: 3038.26,5939.68 cw(c3038.26,5919.68) 3058.26,5919.68 ; 3058.22,5923.26 ccw(c3073.22,5923.26) 3073.22,5908.26
  lines w10 net S$32163: 2645.67,5908.26 ccw(c2645.67,5923.26) 2660.67,5923.26 ; 2660.23,5919.68 cw(c2680.23,5919.68) 2680.23,5939.68

## Other copper
Top Layer:
  region net VCC: 6355.24,2379.85 6374.33,2360.77 6362.95,2354.33 6348.81,2368.47
  region net COL-6: 6666.25,2290.62 6666.25,2308.63 6674.65,2304.62 6674.65,2294.62
  region net LED1_4: 2625.37,5764.98 2612.66,5777.73 2621.44,5780.83 2628.5,5773.75
  region net COL-7: 7519.78,2944.48 7507.04,2957.21 7515.82,2960.32 7522.89,2953.25
  region net COL-7: 6994.8,2936.66 6994.8,2954.67 6986.39,2950.66 6986.39,2940.66
  region net COL-7: 6863.28,2936.43 6862.8,2954.44 6871.31,2950.66 6871.58,2940.66
  region net ROW-2: 6688.13,3167.79 6670.12,3167.79 6674.12,3176.19 6684.12,3176.19
  region net IC1_13: 6611.59,3666.47 6598.85,3653.74 6607.63,3650.63 6614.7,3657.7
  region net IC1_13: 6665.4,2919.36 6683.41,2919.36 6679.4,2927.76 6669.4,2927.76
  region net ROW-2: 6610.41,3763.74 6597.68,3751 6606.46,3747.89 6613.53,3754.97
  region net VCC: 6243.85,2969 6262.78,2949.76 6251.35,2943.42 6237.33,2957.67
  region net COL-9: 8958.78,2883.07 8946.04,2895.81 8954.82,2898.92 8961.89,2891.85
  region net COL-8: 8240.99,2915.77 8228.25,2928.51 8237.03,2931.62 8244.1,2924.55
  region net COL-10: 9893.7,2985.68 9911.71,2985.68 9907.7,2994.08 9897.7,2994.08
  region net COL-10: 9893.7,2969.79 9911.71,2969.79 9907.7,2961.39 9897.7,2961.39
  region net COL-5: 5863.44,3041.82 5863.44,3059.83 5871.85,3055.82 5871.85,3045.82
  region net D+: 5896.89,3113.07 5914.91,3113.07 5910.9,3121.47 5900.9,3121.47
  region net D-: 5841.8,3113.07 5859.81,3113.07 5855.8,3121.47 5845.8,3121.47
  region net COL-2: 4115.33,2890.31 4102.6,2877.57 4099.49,2886.35 4106.56,2893.42
  region net ROW-1: 5108.21,2888.64 5090.2,2888.65 5094.21,2897.05 5104.21,2897.05
  region net ROW-1: 4872.72,4513.74 4859.99,4501 4868.77,4497.89 4875.84,4504.96
  region net COL-4: 6114.88,2955.56 6114.88,2973.57 6106.47,2969.56 6106.47,2959.56
  region net VCC: 6609.72,3582.2 6582.73,3582.25 6586.2,3569.65 6606.2,3569.61
  region net VCC: 6296.17,2905.03 6296.17,2932.02 6283.57,2928.52 6283.57,2908.52
  region net VCC: 6319.97,2905.03 6319.97,2932.02 6332.56,2928.52 6332.56,2908.52
  region net VCC: 5805.6,2905.03 5805.6,2932.02 5818.2,2928.52 5818.2,2908.52
  region net VCC: 5732.37,2395.87 5751.46,2414.94 5757.89,2403.56 5743.74,2389.43
  region net VCC: 5747,2425.72 5720.01,2425.72 5723.5,2438.32 5743.5,2438.32
  region net VCC: 5746.97,2684.97 5719.99,2684.92 5723.5,2672.33 5743.5,2672.37
  region net LED1_4: 3143.76,5718.55 3131.06,5705.78 3127.92,5714.54 3134.97,5721.63
  region net LED58_4: 7057.83,2718.68 7045.1,2705.94 7041.98,2714.71 7049.05,2721.79
  region net LED58_4: 4707.65,2766.51 4694.92,2753.76 4703.7,2750.66 4710.76,2757.73
  region net ROW-3: 5783.91,3003.98 5783.91,3021.99 5792.32,3017.99 5792.32,3007.99
  region net ROW-3: 6518.03,3003.98 6518.03,3021.99 6509.62,3017.99 6509.62,3007.99
  region net COL-14: 5992.68,2270.45 5979.97,2257.7 5988.75,2254.6 5995.81,2261.68
  region net COL-13: 6040.33,2270.43 6027.59,2257.7 6036.37,2254.59 6043.44,2261.66
  region net COL-12: 6082.44,2270.45 6069.73,2257.7 6078.51,2254.6 6085.57,2261.68
  region net COL-11: 6130.39,2260.7 6130.35,2278.71 6138.77,2274.72 6138.79,2264.72
  region net COL-3: 5444.46,2561.12 5444.46,2579.13 5436.05,2575.12 5436.05,2565.12
  region net COL-1: 5444.46,2530.32 5444.46,2548.33 5436.05,2544.32 5436.05,2534.32
  region net COL-0: 5444.46,2498.52 5444.46,2516.53 5436.05,2512.52 5436.05,2502.52
  region net USB1_A7: 2820.89,5586.06 2838.91,5586.06 2834.9,5577.66 2824.9,5577.66
  region net USB1_A6: 2897.59,5586 2879.57,5586.02 2883.57,5577.61 2893.57,5577.6
  region net USB1_A7: 2675.66,5181.93 2675.65,5199.94 2684.06,5195.94 2684.06,5185.94
  region net USB1_A6: 2675.66,5149.65 2675.65,5167.66 2684.06,5163.65 2684.06,5153.65
  region net VCC: 2527.18,5004.29 2500.19,5004.25 2503.7,4991.66 2523.7,4991.69
  region net VCC: 2314.3,4899.28 2314.22,4872.29 2326.83,4875.75 2326.88,4895.75
  region net D+: 5666.68,4445.98 5653.95,4433.24 5662.72,4430.13 5669.79,4437.2
  region net D-: 5666.68,4410.18 5653.95,4397.44 5662.72,4394.33 5669.79,4401.4
  region net VCC: 3325.25,4260.88 3298.26,4260.97 3301.72,4248.36 3321.72,4248.29
  region net VCC: 3324.93,4167.78 3297.95,4167.87 3301.48,4180.45 3321.48,4180.38
  region net IC1_13: 3512.53,3814.47 3494.52,3814.51 3498.5,3806.1 3508.5,3806.07
  region net IC1_13: 3561.84,3677.3 3549.01,3664.65 3545.96,3673.45 3553.08,3680.47
  region net VCC: 5721.59,2745.93 5721.59,2772.92 5709,2769.42 5709,2749.42
  region net VCC: 4862.3,2745.93 4862.3,2772.92 4874.9,2769.42 4874.9,2749.42
  region net COL-6: 7187.33,2290.29 7134.3,2343.33 7140.09,2303.16 7147.17,2296.09
  region net COL-6: 7221.7,2373.27 7146.7,2373.27 7179.2,2408.27 7189.2,2408.27
  region net COL-0: 2640.41,4593.32 2587.38,4540.29 2635.11,4538.52 2642.18,4545.59
  region net COL-0: 2628.01,4623.26 2553.01,4623.26 2585.51,4658.26 2595.51,4658.26
  region net COL-14: 12752.79,4623.26 12677.79,4623.26 12710.29,4658.26 12720.29,4658.26
  region net COL-14: 12765.19,4593.32 12712.16,4540.29 12759.89,4538.52 12766.96,4545.59
  region net COL-0: 2453.01,5343.32 2399.98,5290.29 2447.71,5288.52 2454.78,5295.59
  region net COL-1: 3155.82,5290.29 3102.81,5343.34 3101.02,5295.62 3108.09,5288.54
  region net COL-2: 3906.69,5290.32 3853.18,5342.88 3851.85,5295.13 3858.98,5288.12
  region net COL-3: 4655.48,5290.27 4602.83,5343.69 4600.72,5295.97 4607.74,5288.85
  region net COL-4: 5405.68,5290.28 5352.82,5343.49 5350.9,5295.76 5357.94,5288.67
  region net COL-5: 6156.29,5290.32 6102.78,5342.88 6101.45,5295.13 6108.58,5288.12
  region net COL-6: 6906.23,5290.29 6853.2,5343.32 6851.43,5295.59 6858.5,5288.52
  region net COL-7: 7656.29,5290.29 7603.2,5343.27 7601.48,5295.54 7608.56,5288.47
  region net COL-8: 8405.83,5290.29 8352.8,5343.32 8351.03,5295.59 8358.1,5288.52
  region net COL-9: 9155.47,5290.27 9102.82,5343.69 9100.71,5295.97 9107.73,5288.85
  region net COL-10: 9906.47,5290.31 9853.18,5343.08 9851.64,5295.34 9858.75,5288.3
  region net COL-11: 10656.47,5290.31 10603.18,5343.08 10601.65,5295.34 10608.75,5288.3
  region net COL-12: 11406.06,5290.28 11353.2,5343.49 11351.28,5295.76 11358.33,5288.67
  region net COL-2: 3565.43,4623.25 3490.43,4623.28 3522.95,4658.27 3532.95,4658.26
  region net COL-2: 3577.81,4593.32 3524.78,4540.29 3572.51,4538.52 3579.58,4545.59
  region net COL-3: 4242.09,4625.07 4317,4621.38 4286.27,4657.93 4276.27,4658.43
  region net COL-3: 4327.81,4593.32 4274.78,4540.29 4322.51,4538.52 4329.58,4545.59
  region net COL-4: 5065.45,4623.22 4990.45,4623.31 5022.99,4658.27 5032.99,4658.26
  region net COL-4: 5077.81,4593.32 5024.78,4540.29 5072.51,4538.52 5079.58,4545.59
  region net COL-5: 5815.42,4623.25 5740.42,4623.28 5772.94,4658.27 5782.94,4658.26
  region net COL-5: 5827.81,4593.32 5774.78,4540.29 5822.51,4538.52 5829.58,4545.59
  region net COL-6: 6565.45,4623.21 6490.45,4623.32 6523.01,4658.27 6533.01,4658.26
  region net COL-6: 6577.8,4593.32 6524.77,4540.29 6572.5,4538.52 6579.57,4545.59
  region net COL-7: 7315.42,4623.25 7240.42,4623.28 7272.94,4658.27 7282.94,4658.26
  region net COL-7: 7327.8,4593.32 7274.77,4540.29 7322.5,4538.52 7329.57,4545.59
  region net COL-8: 8065.38,4623.29 7990.38,4623.24 8022.85,4658.26 8032.85,4658.27
  region net COL-8: 8077.8,4593.32 8024.77,4540.29 8072.5,4538.52 8079.57,4545.59
  region net COL-9: 8815.42,4623.24 8740.42,4623.29 8772.94,4658.27 8782.94,4658.26
  region net COL-9: 8827.8,4593.32 8774.77,4540.29 8822.5,4538.52 8829.57,4545.59
  region net COL-10: 9565.37,4623.3 9490.37,4623.23 9522.84,4658.26 9532.84,4658.27
  region net COL-10: 9577.8,4593.32 9524.77,4540.29 9572.5,4538.52 9579.57,4545.59
  region net COL-11: 10327.8,4593.32 10274.77,4540.29 10322.5,4538.52 10329.57,4545.59
  region net COL-11: 10315.4,4623.26 10240.4,4623.26 10272.9,4658.26 10282.9,4658.26
  region net COL-12: 11065.37,4623.3 10990.37,4623.23 11022.84,4658.26 11032.84,4658.27
  region net COL-12: 11077.8,4593.32 11024.77,4540.29 11072.5,4538.52 11079.57,4545.59
  region net COL-13: 11811.02,4627.64 11810.91,4552.64 11845.96,4585.08 11845.97,4595.08
  region net COL-2: 3752.81,3873.27 3677.81,3873.27 3710.31,3908.27 3720.31,3908.27
  region net COL-2: 3765.21,3843.33 3712.18,3790.3 3759.91,3788.53 3766.98,3795.6
  region net COL-3: 4502.81,3873.27 4427.81,3873.27 4460.31,3908.27 4470.31,3908.27
  region net COL-3: 4515.21,3843.33 4462.18,3790.3 4509.91,3788.53 4516.98,3795.6
  region net COL-4: 5252.81,3873.26 5177.81,3873.26 5210.31,3908.26 5220.31,3908.26
  region net COL-4: 5265.21,3843.32 5212.18,3790.29 5259.91,3788.52 5266.98,3795.59
  region net COL-5: 6002.81,3873.26 5927.81,3873.26 5960.31,3908.26 5970.31,3908.26
  region net COL-5: 6015.21,3843.32 5962.18,3790.29 6009.91,3788.52 6016.98,3795.59
  region net COL-6: 6752.81,3873.26 6677.81,3873.26 6710.31,3908.26 6720.31,3908.26
  region net COL-6: 6765.21,3843.32 6712.18,3790.29 6759.91,3788.52 6766.98,3795.59
  region net COL-7: 7502.8,3873.26 7427.8,3873.26 7460.3,3908.26 7470.3,3908.26
  region net COL-7: 7515.2,3843.32 7462.17,3790.29 7509.9,3788.52 7516.97,3795.59
  region net COL-8: 8252.8,3873.26 8177.8,3873.26 8210.3,3908.26 8220.3,3908.26
  region net COL-8: 8265.2,3843.32 8212.17,3790.29 8259.9,3788.52 8266.97,3795.59
  region net COL-9: 9002.8,3873.26 8927.8,3873.26 8960.3,3908.26 8970.3,3908.26
  region net COL-9: 9015.2,3843.32 8962.17,3790.29 9009.9,3788.52 9016.97,3795.59
  region net COL-10: 9752.8,3873.26 9677.8,3873.26 9710.3,3908.26 9720.3,3908.26
  region net COL-10: 9765.2,3843.32 9712.17,3790.29 9759.9,3788.52 9766.97,3795.59
  region net COL-11: 10502.8,3873.26 10427.8,3873.26 10460.3,3908.26 10470.3,3908.26
  region net COL-11: 10515.2,3843.32 10462.17,3790.29 10509.9,3788.52 10516.97,3795.59
  region net COL-12: 11252.8,3873.26 11177.8,3873.26 11210.3,3908.26 11220.3,3908.26
  region net COL-12: 11265.2,3843.32 11212.17,3790.29 11259.9,3788.52 11266.97,3795.59
  region net COL-2: 3952.61,3093.32 3899.58,3040.29 3947.31,3038.52 3954.38,3045.59
  region net COL-2: 3940.21,3123.26 3865.21,3123.26 3897.71,3158.26 3907.71,3158.26
  region net COL-3: 4655.84,3040.29 4602.81,3093.32 4601.04,3045.59 4608.11,3038.52
  region net COL-3: 4690.21,3123.26 4615.21,3123.26 4647.71,3158.26 4657.71,3158.26
  region net COL-4: 5453,3093.32 5399.97,3040.29 5447.7,3038.52 5454.77,3045.59
  region net COL-4: 5440.6,3123.26 5365.6,3123.26 5398.1,3158.26 5408.1,3158.26
  region net COL-5: 6190.6,3123.26 6115.6,3123.26 6148.1,3158.26 6158.1,3158.26
  region net COL-5: 6156.23,3040.29 6103.2,3093.32 6110.2,3054.36 6117.27,3047.29
  region net COL-6: 6952.66,3096.86 6903.52,3040.19 6951.25,3041.81 6957.81,3049.38
  region net COL-6: 6940.6,3123.26 6865.6,3123.26 6898.1,3158.26 6908.1,3158.26
  region net COL-7: 7690.21,3123.26 7615.21,3123.26 7647.71,3158.26 7657.71,3158.26
  region net COL-7: 7655.84,3040.29 7602.81,3093.33 7601.04,3045.6 7608.11,3038.53
  region net COL-8: 8440.2,3123.26 8365.2,3123.26 8397.7,3158.26 8407.7,3158.26
  region net COL-8: 8405.82,3040.29 8352.8,3093.34 8351.02,3045.61 8358.09,3038.54
  region net COL-9: 9190.6,3123.26 9115.6,3123.26 9148.1,3158.26 9158.1,3158.26
  region net COL-9: 9156.23,3040.29 9103.2,3093.33 9101.43,3045.6 9108.5,3038.53
  region net COL-10: 9940.2,3123.26 9865.2,3123.26 9897.7,3158.26 9907.7,3158.26
  region net COL-10: 9940.2,3057.12 9865.2,3057.12 9897.7,3022.12 9907.7,3022.12
  region net COL-11: 10690.59,3123.26 10615.59,3123.26 10648.09,3158.26 10658.09,3158.26
  region net COL-11: 10690.59,3057.12 10615.59,3057.12 10648.09,3022.12 10658.09,3022.12
  region net COL-12: 11440.2,3123.26 11365.2,3123.26 11397.7,3158.26 11407.7,3158.26
  region net COL-12: 11440.2,3057.12 11365.2,3057.12 11397.7,3022.12 11407.7,3022.12
  region net COL-13: 12190.2,3057.12 12115.2,3057.12 12147.7,3022.12 12157.7,3022.12
  region net COL-13: 12190.2,3123.26 12115.2,3123.26 12147.7,3158.26 12157.7,3158.26
  region net COL-14: 12940.19,3123.26 12865.19,3123.26 12897.69,3158.26 12907.69,3158.26
  region net COL-14: 12940.2,3057.13 12865.2,3057.12 12897.7,3022.12 12907.7,3022.12
  region net COL-10: 9940.2,2373.27 9865.2,2373.27 9897.7,2408.27 9907.7,2408.27
  region net COL-11: 10620.06,2302.66 10619.98,2377.66 10585.02,2345.12 10585.03,2335.12
  region net COL-11: 10690.59,2373.27 10615.59,2373.27 10648.09,2408.27 10658.09,2408.27
  region net COL-12: 11405.82,2290.29 11352.8,2343.34 11351.02,2295.61 11358.09,2288.54
  region net COL-12: 11440.2,2373.27 11365.2,2373.27 11397.7,2408.27 11407.7,2408.27
  region net COL-13: 12155.82,2290.29 12102.8,2343.34 12101.02,2295.61 12108.09,2288.54
  region net COL-13: 12190.2,2373.27 12115.2,2373.27 12147.7,2408.27 12157.7,2408.27
  region net COL-14: 12905.82,2290.29 12852.8,2343.34 12851.02,2295.61 12858.09,2288.54
  region net COL-14: 12940.2,2373.27 12865.2,2373.27 12897.7,2408.27 12907.7,2408.27
  region net COL-13: 12471.7,3873.26 12396.7,3873.27 12429.2,3908.26 12439.2,3908.26
  region net COL-13: 12437.32,3790.29 12384.29,3843.32 12382.52,3795.59 12389.59,3788.52
  region net COL-14: 12577.79,5343.32 12524.76,5290.29 12572.49,5288.52 12579.56,5295.59
  region net COL-1: 2815.43,3123.24 2740.43,3123.29 2772.95,3158.27 2782.95,3158.26
  region net COL-1: 2741.01,3056.45 2816,3057.8 2784.13,3022.22 2774.13,3022.04
  region net COL-0: 2687.32,3790.29 2634.31,3843.35 2632.52,3795.62 2639.59,3788.54
  region net COL-0: 2721.71,3873.26 2646.71,3873.26 2679.21,3908.26 2689.21,3908.26
  region net COL-0: 2546.71,2343.32 2493.67,2290.29 2541.4,2288.52 2548.47,2295.59
  region net COL-0: 2534.3,2373.27 2459.3,2373.26 2491.8,2408.27 2501.8,2408.27
  region net COL-1: 3484.11,2343.34 3431.09,2290.29 3478.82,2288.53 3485.89,2295.61
  region net COL-1: 3401.14,2302.69 3401.14,2377.69 3366.14,2345.19 3366.14,2335.19
  region net COL-3: 4421.51,2343.34 4368.49,2290.29 4416.22,2288.53 4423.29,2295.61
  region net COL-3: 4409.11,2373.27 4334.11,2373.27 4366.61,2408.27 4376.61,2408.27
Bottom Layer:
  drawing of 688 lines, arcs and shapes, not listed

## Silkscreen, mask and mechanical layers (free items; w line width, h text height)
Bottom Overlay:
  text "Gazlowe" at 9090.93,2581.1 h314.96 r356
  text "DESIGNED BY SEATON JIANG" at 8899.2,2402.75 h78.74
  text "SEATONJIANG.COM" at 8690.54,2288.18 h78.74
Document:
  drawing of 547 lines, arcs and shapes, not listed